# Altium PCB PCB.PcbDoc
Units mm, origin at the board's own origin, x right, y up, seen from the top; angles counter-clockwise.
Board outline 38.61 x 38.61 mm, 4 copper layers (Top Layer, Signal Layer 1, Signal Layer 2, Bottom Layer), stack 1.54 mm thick; 1 components, 0 nets, 104 pads, 0 vias.
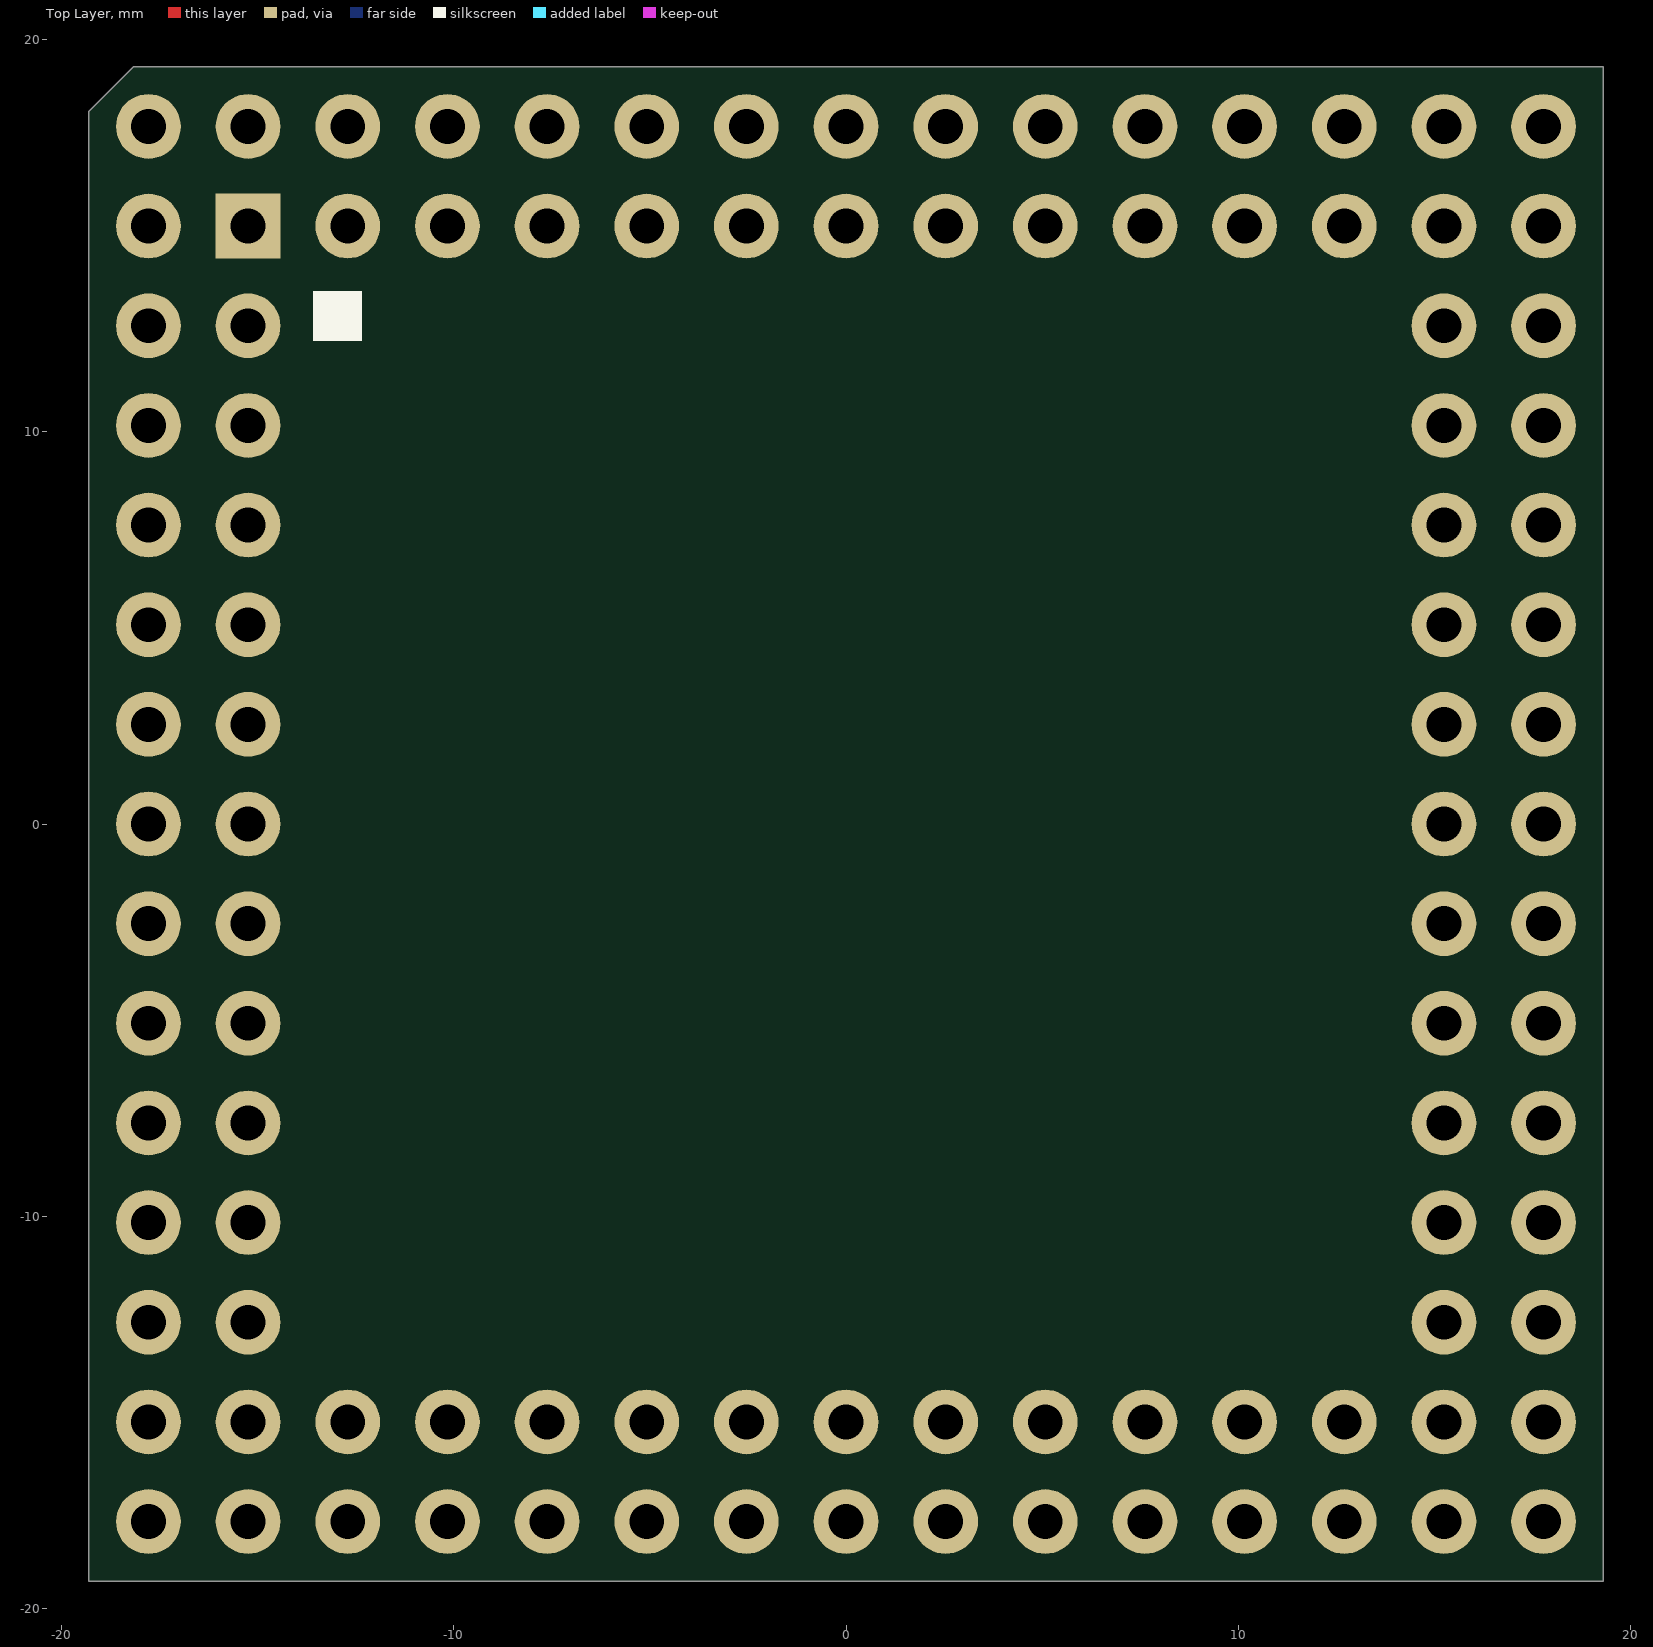
[diagram p0: Top Layer view]
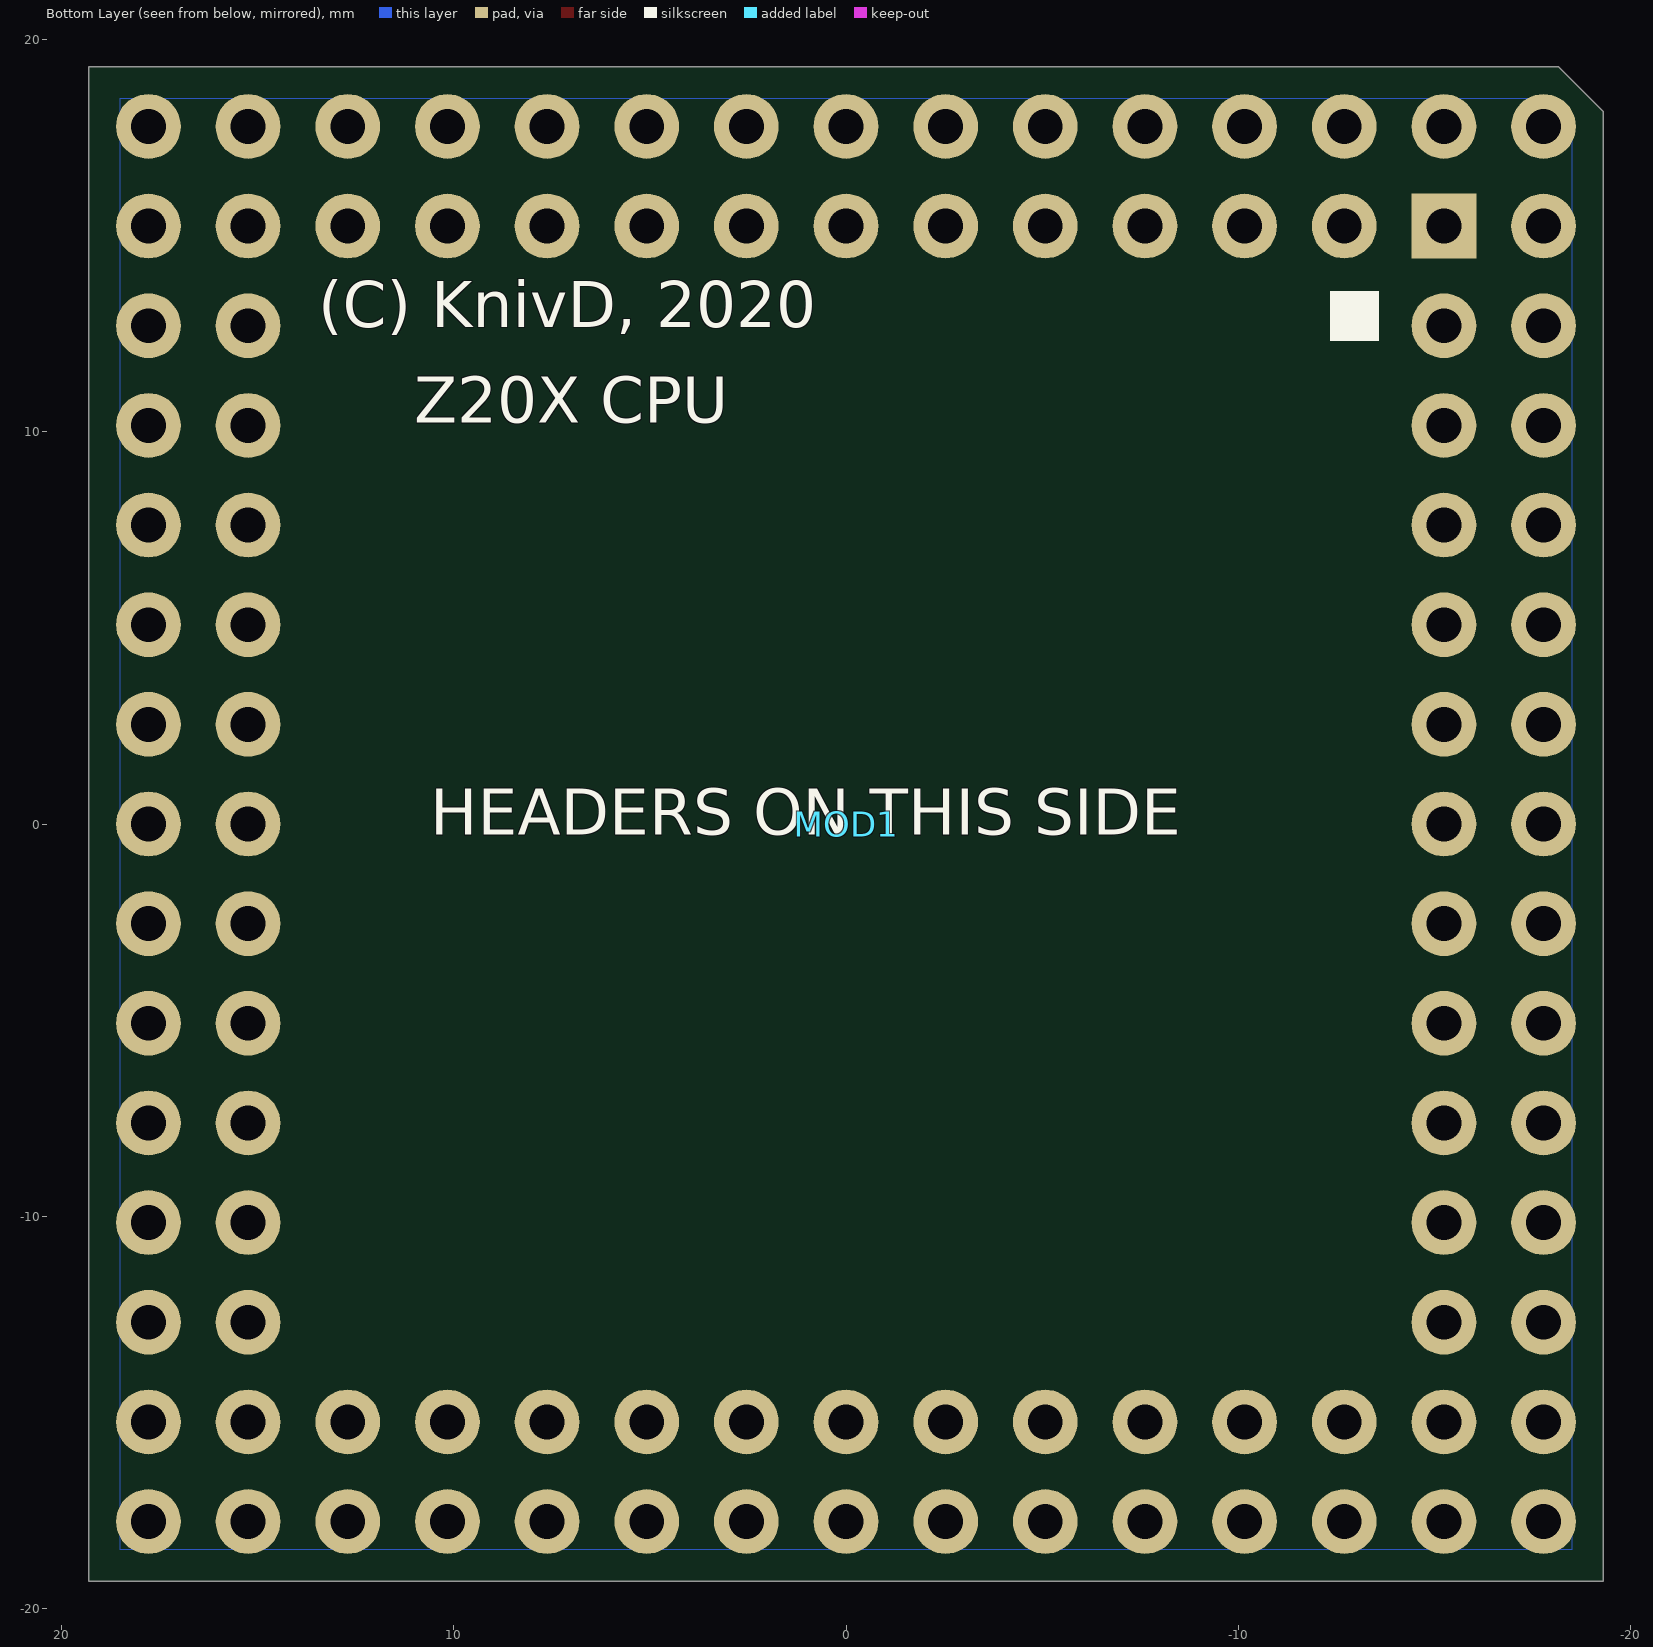
[diagram p1: Bottom Layer view, seen from below]
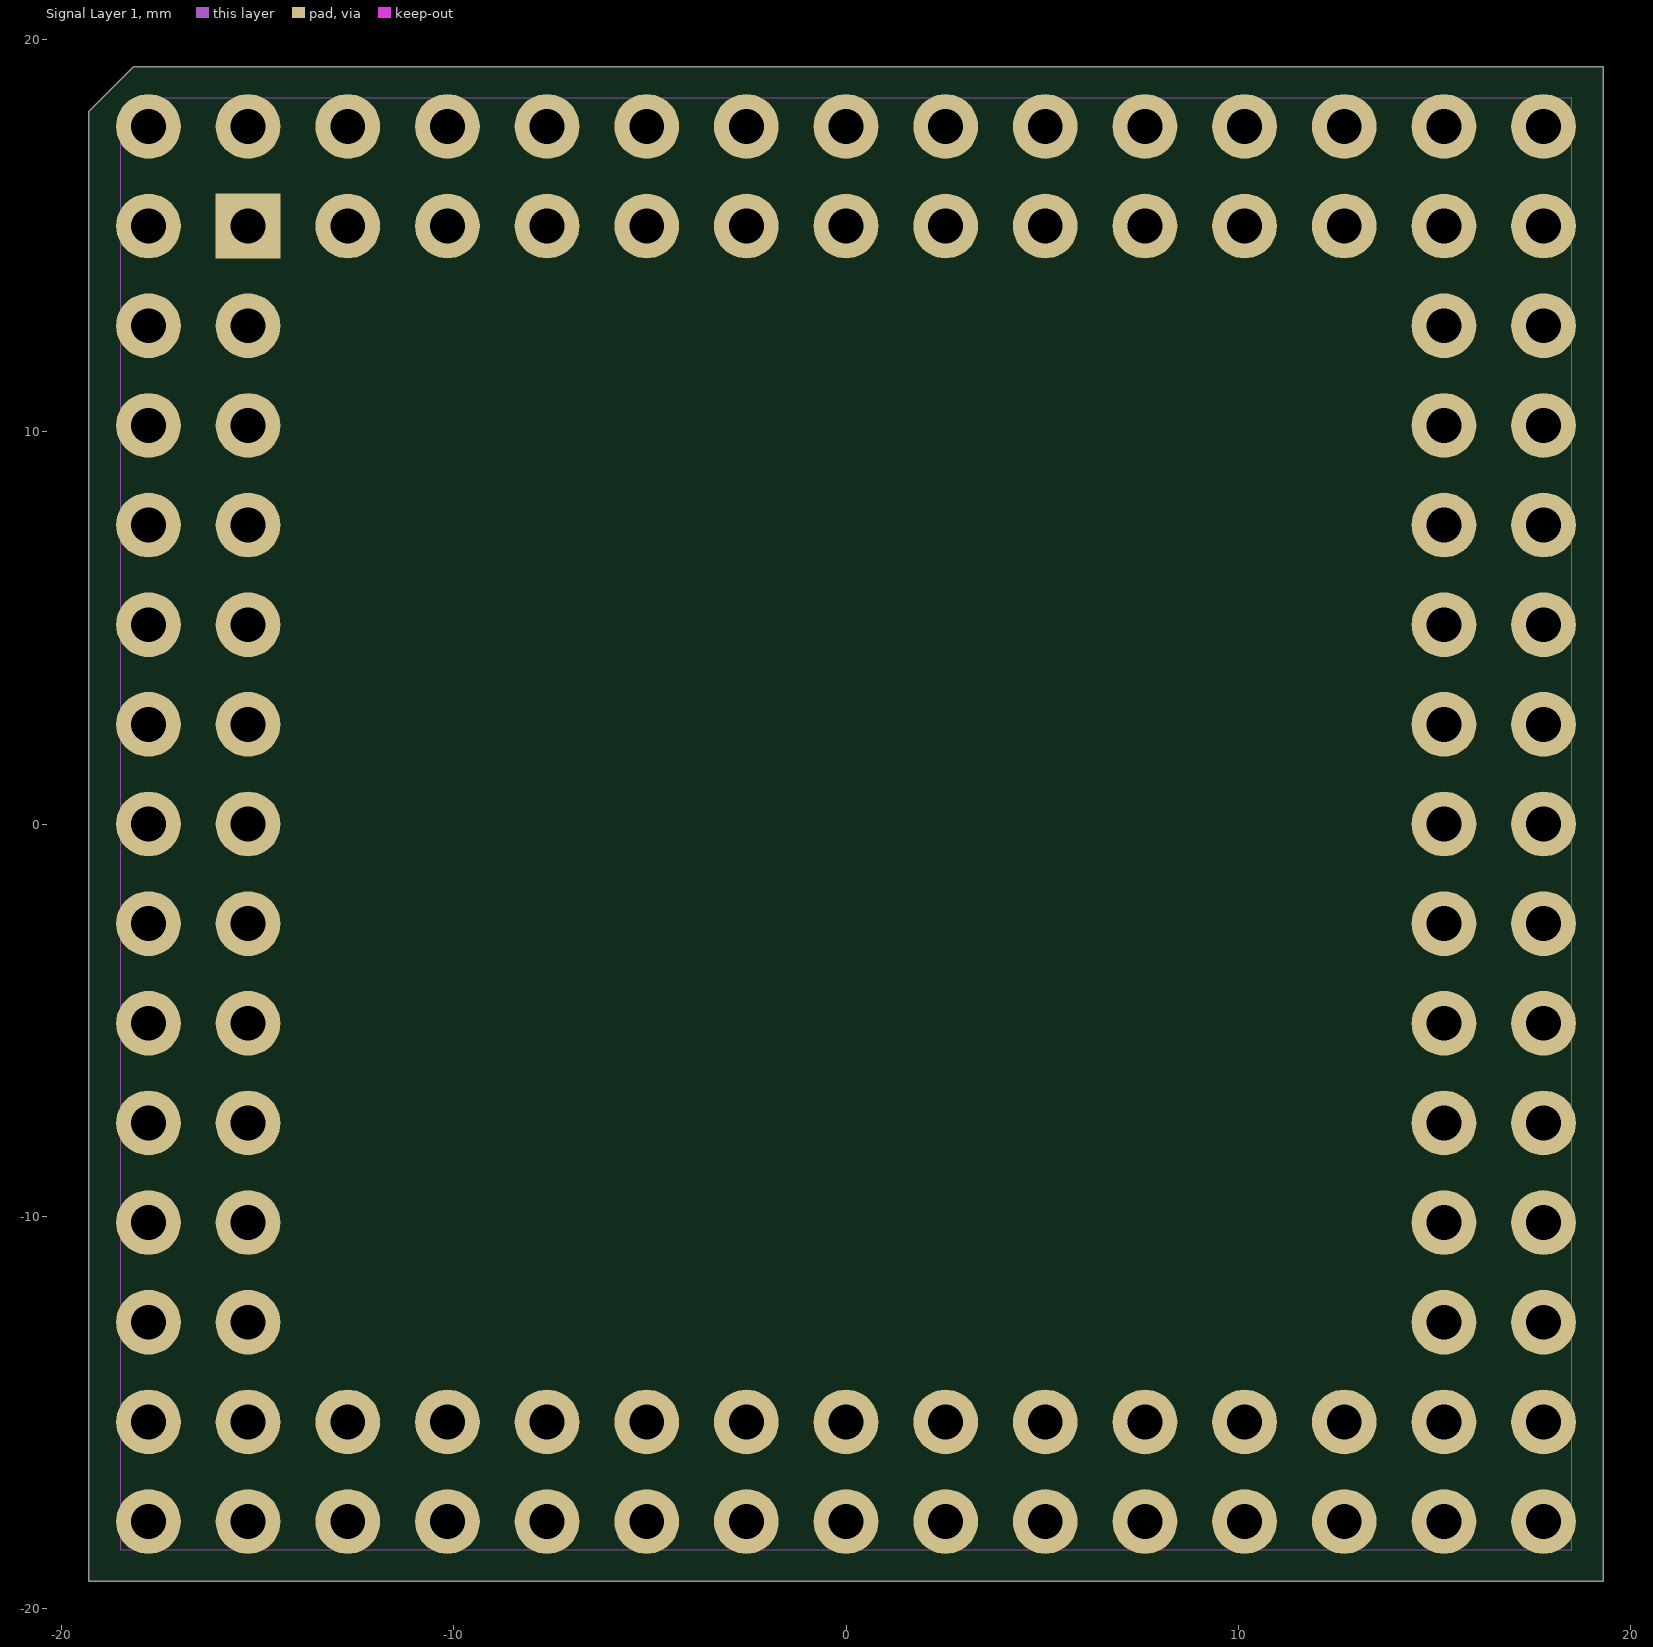
[diagram p2: Signal Layer 1]
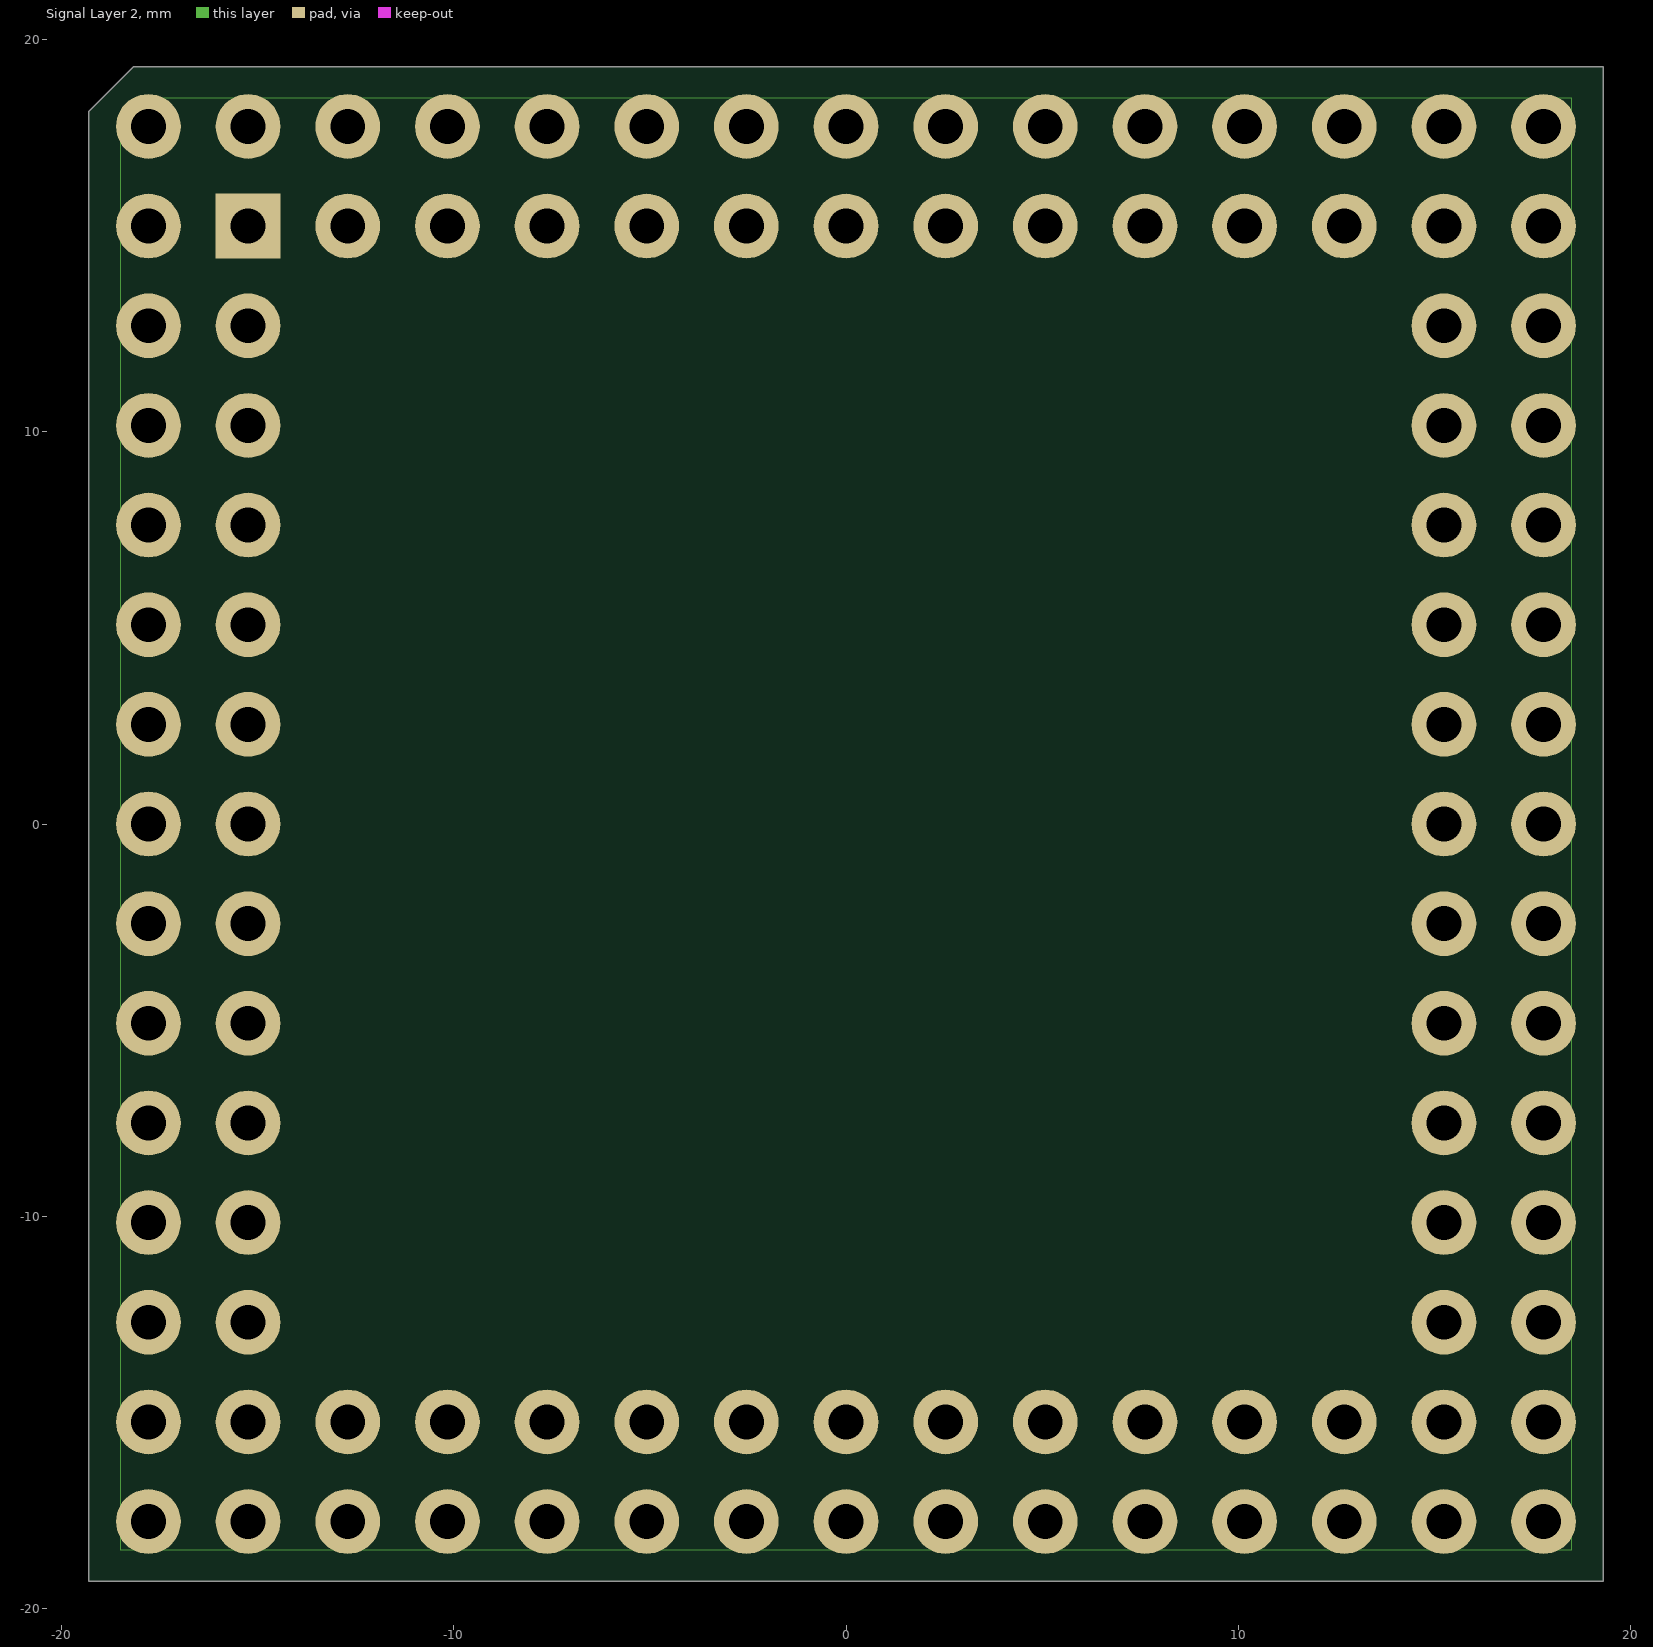
[diagram p3: Signal Layer 2]

## Layer stack, top to bottom
Top Solder: solder mask 0.0102, Solder Resist, Dk 3.5
Top Layer: signal copper 0.0356
Dielectric 1: core 0.508, FR-4, Dk 4.2
Signal Layer 1: signal copper 0.036
Dielectric 3: prepreg 0.381, Dk 4.2
Signal Layer 2: signal copper 0.036
Dielectric 2: core 0.508, Dk 4.2
Bottom Layer: signal copper 0.0356
Solder Side: solder mask 0.0102, Solder Resist, Dk 3.5

## Board outline
-19.304,-19.304 -19.304,18.161 -18.161,19.304 19.304,19.304 19.304,-19.304

## Design rules (kind name [scope] priority, off if disabled: settings)
Clearance Clearance_Poly [(IsRegion)] p1: gap=0.35 ignorepadtopadclearanceinfootprint=TRUE
Clearance [All] p2: gap=0.24 ignorepadtopadclearanceinfootprint=TRUE
DiffPairsRouting [All] p1: maxlimit=1 minlimit=0.15 mostfreqgap=0.2 toplayer_minwidth=0.2 toplayer_maxwidth=1 toplayer_prefwidth=0.2 midlayer1_minwidth=0.2 midlayer1_maxwidth=1 midlayer1_prefwidth=0.2 midlayer2_minwidth=0.2 midlayer2_maxwidth=1 midlayer2_prefwidth=0.2 bottomlayer_minwidth=0.2 bottomlayer_maxwidth=1 bottomlayer_prefwidth=0.2 maxuncoupledlength=12.7
HoleSize [All] p1 off: absolutevalues=TRUE maxlimit=2.5 minlimit=0.025 maxpercent=80.000 minpercent=20.000
HoleToHoleClearance [All] p1 off: gap=0 allowstackedmicrovias=TRUE
LayerPairs [All] p1 off: enforce=TRUE
MaxMinImpedance [InNet('ANT50R')] p1: minimum=49.90 maximum=50.10
MinimumSolderMaskSliver [All] p1 off: minsoldermaskwidth=-50
NetAntennae [All] p1 off: netantennaetolerance=0
PlaneClearance [All] p1: clearance=0.5
PlaneConnect [All] p1: planeconnectstyle=Direct reliefexpansion=0.5 reliefentries=4 reliefconductorwidth=0.35 reliefairgap=0.35
PolygonConnect [All] p1: thpad.connectstyle=Relief thpad.reliefconductorwidth=0.25 thpad.reliefentries=4 thpad.polygonreliefangle="90 Angle" thpad.airgapwidth=0.35 smdpad.connectstyle=Relief smdpad.reliefconductorwidth=0.25 smdpad.reliefentries=4 smdpad.polygonreliefangle="90 Angle" smdpad.airgapwidth=0.35 via.connectstyle=Direct via.reliefconductorwidth=0.35 via.reliefentries=4 via.polygonreliefangle="90 Angle" via.airgapwidth=0.35
RoutingCorners [All] p1: cornerstyle=45-Degree minsetback=2 maxsetback=2
RoutingVias [All] p1: holewidth=0.3 width=0.6 viastyle="Through Hole" minholewidth=0.3 minwidth=0.6 maxholewidth=1 maxwidth=2
SilkToBoardRegionClearance [All] p1 off:
SilkToSilkClearance [All] p1 off: silktosilkclearance=-50
SilkToSolderMaskClearance [IsPad] p1 off: minsilkscreentomaskgap=-50 clearancetoexposedcopper=TRUE
SolderMaskExpansion [All] p1: expansion=0.102
Width [All] p1: maxlimit=0.5 minlimit=0.2 preferedwidth=0.2
18 further rules are at their usual default settings.

## Components (designator, comment, footprint, x,y, rotation, side; value= is the part's Value field where it differs from the comment)
MOD1 "Z20X CPU Module" PGA100X15 0,0 r0 bottom locked

## Footprints (in the part's own frame and the unit in brackets; to place one, negate y for a bottom-side part, rotate by r counter-clockwise, add the part's x,y. Pads: shape width x height; smd on the part's side, far side on the other; paste and mask are expansions set on the pad)
PGA100X15 [mil] "PGA module, 100 pins, 2.54 pitch"
  rect 65x65 hole 35: 1(-600,-600)
  round 65 hole 35: 2(-700,-600) 3(-600,-500) 4(-700,-500) 5(-600,-400) 6(-700,-400) 7(-600,-300) 8(-700,-300) 9(-600,-200) 10(-700,-200) 11(-600,-100) 12(-700,-100) 13(-600,0) 14(-700,0) 15(-600,100) 16(-700,100) 17(-600,200) 18(-700,200) 19(-600,300) 20(-700,300) 21(-600,400) 22(-700,400) 23(-600,500) 24(-700,500) 25(-600,600) 26(-700,600) 27(-600,700) 28(-500,600) 29(-500,700) 30(-400,600) 31(-400,700) 32(-300,600) 33(-300,700) 34(-200,600) 35(-200,700) 36(-100,600) 37(-100,700) 38(0,600) 39(0,700) 40(100,600) 41(100,700) 42(200,600) 43(200,700) 44(300,600) 45(300,700) 46(400,600) 47(400,700) 48(500,600) 49(500,700) 50(600,600) 51(600,700) 52(700,600) 53(600,500) 54(700,500) 55(600,400) 56(700,400) 57(600,300) 58(700,300) 59(600,200) 60(700,200) 61(600,100) 62(700,100) 63(600,0) 64(700,0) 65(600,-100) 66(700,-100) 67(600,-200) 68(700,-200) 69(600,-300) 70(700,-300) 71(600,-400) 72(700,-400) 73(600,-500) 74(700,-500) 75(600,-600) 76(700,-600) 77(600,-700) 78(500,-600) 79(500,-700) 80(400,-600) 81(400,-700) 82(300,-600) 83(300,-700) 84(200,-600) 85(200,-700) 86(100,-600) 87(100,-700) 88(0,-600) 89(0,-700) 90(-100,-600) 91(-100,-700) 92(-200,-600) 93(-200,-700) 94(-300,-600) 95(-300,-700) 96(-400,-600) 97(-400,-700) 98(-500,-600) 99(-500,-700) 100(-600,-700) 101(-700,-700) 102(-700,700) 103(700,700) 104(700,-700)
  silkscreen extent -535,-535 -486,-485

## Nets (pads, with @x,y where several pads share a name; then routed paths per layer and width w, separated by ;. In a path a pad name is that pad's centre, name@x,y a point inside that pad or via, vN(x,y) a via of type N, cw(c..) or ccw(c..) an arc to the next point about the centre after c; other vN are vias at no path point)
pads on no net: MOD1.1 MOD1.2 MOD1.3 MOD1.4 MOD1.5 MOD1.6 MOD1.7 MOD1.8 MOD1.9 MOD1.10 MOD1.11 MOD1.12 MOD1.13 MOD1.14 MOD1.15 MOD1.16 MOD1.17 MOD1.18 MOD1.19 MOD1.20 MOD1.21 MOD1.22 MOD1.23 MOD1.24 MOD1.25 MOD1.26 MOD1.27 MOD1.28 MOD1.29 MOD1.30 MOD1.31 MOD1.32 MOD1.33 MOD1.34 MOD1.35 MOD1.36 MOD1.37 MOD1.38 MOD1.39 MOD1.40 MOD1.41 MOD1.42 MOD1.43 MOD1.44 MOD1.45 MOD1.46 MOD1.47 MOD1.48 MOD1.49 MOD1.50 MOD1.51 MOD1.52 MOD1.53 MOD1.54 MOD1.55 MOD1.56 MOD1.57 MOD1.58 MOD1.59 MOD1.60 MOD1.61 MOD1.62 MOD1.63 MOD1.64 MOD1.65 MOD1.66 MOD1.67 MOD1.68 MOD1.69 MOD1.70 MOD1.71 MOD1.72 MOD1.73 MOD1.74 MOD1.75 MOD1.76 MOD1.77 MOD1.78 MOD1.79 MOD1.80 MOD1.81 MOD1.82 MOD1.83 MOD1.84 MOD1.85 MOD1.86 MOD1.87 MOD1.88 MOD1.89 MOD1.90 MOD1.91 MOD1.92 MOD1.93 MOD1.94 MOD1.95 MOD1.96 MOD1.97 MOD1.98 MOD1.99 MOD1.100 MOD1.101 MOD1.102 MOD1.103 MOD1.104

## Polygon pours and split planes (outlines as drawn)
no net on Signal Layer 2 "NONET_L03_P002" (solid, remove dead copper, shelved, pour order 2): -18.5,-18.5 18.5,-18.5 18.5,18.5 -17.5,18.5 -18.5,17.5
no net on Signal Layer 1 "NONET_L02_P000" (solid, remove dead copper, shelved, pour order 0): -18.5,-18.5 18.5,-18.5 18.5,18.5 -17.5,18.5 -18.5,17.5
no net on Bottom Layer "NONET_L04_P004" (solid, remove dead copper, shelved, pour order 4): -18.5,-18.5 18.5,-18.5 18.5,18.5 -17.5,18.5 -18.5,17.5

## Silkscreen, mask and mechanical layers (free items; w line width, h text height)
Top Overlay:
  rectangle: -13.589,12.314 -12.339,13.589
Bottom Overlay:
  text "(C) KnivD, 2020" at 13.45,12.275 h2
  text "Z20X CPU" at 11,9.85 h2
  text "HEADERS ON THIS SIDE" at 10.6,-0.65 h2
Mechanical 1:
  the board outline again, w0.35